# Altium PCB test_blood_pressure.PcbDoc
Units mil, origin at the board's own origin, x right, y up, seen from the top; angles counter-clockwise.
Board outline 2765.94 x 1295.03 mil, 2 copper layers (Top Layer, Bottom Layer); 50 components, 51 nets, 240 pads, 41 vias.
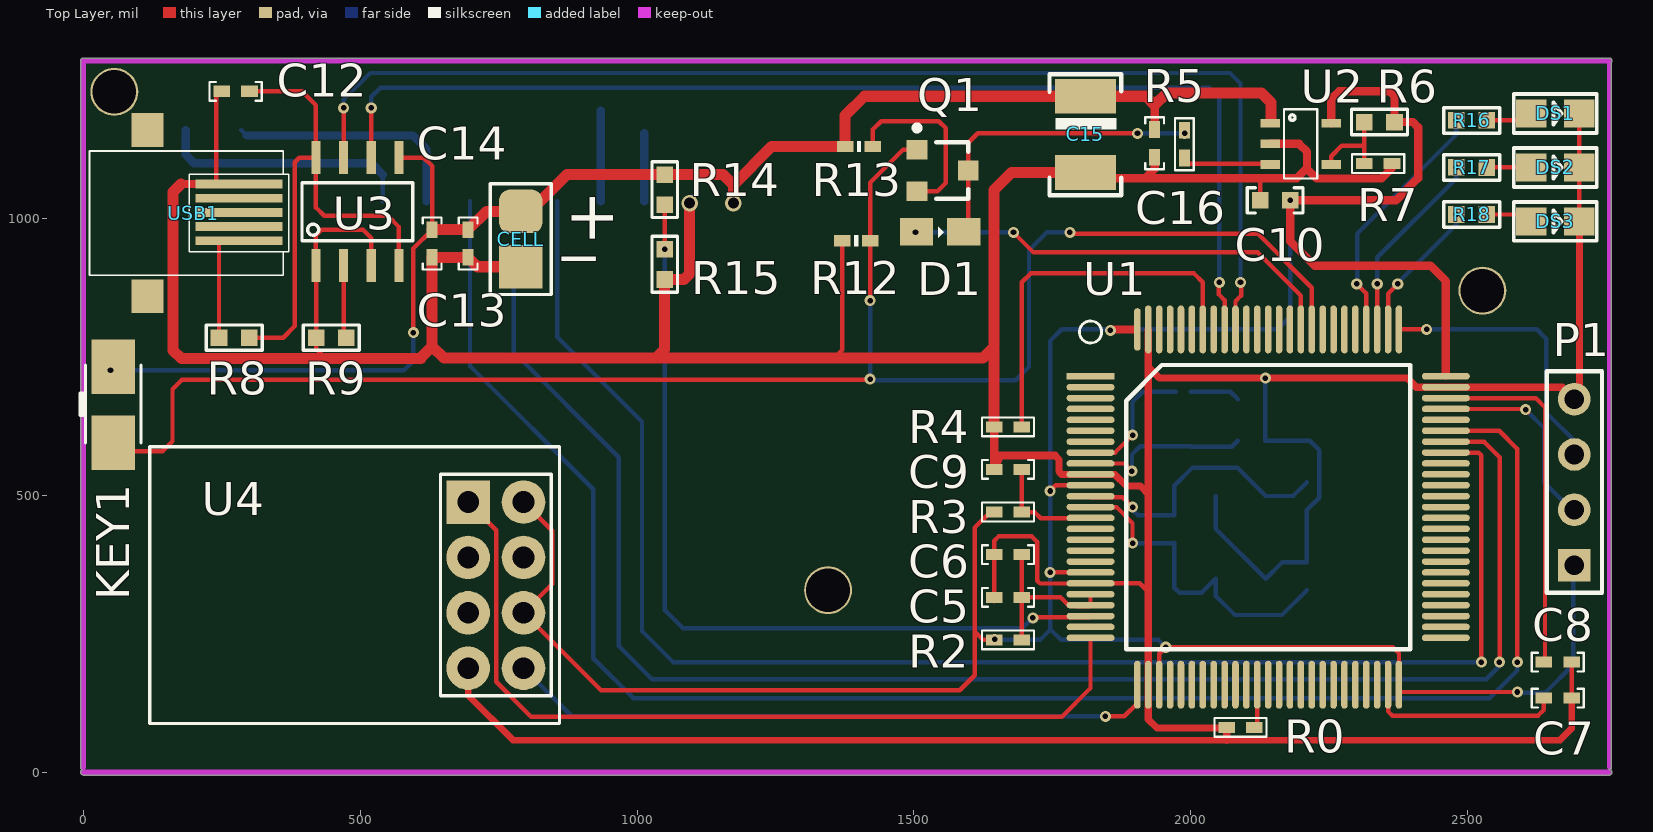
[diagram p0: Top Layer view]
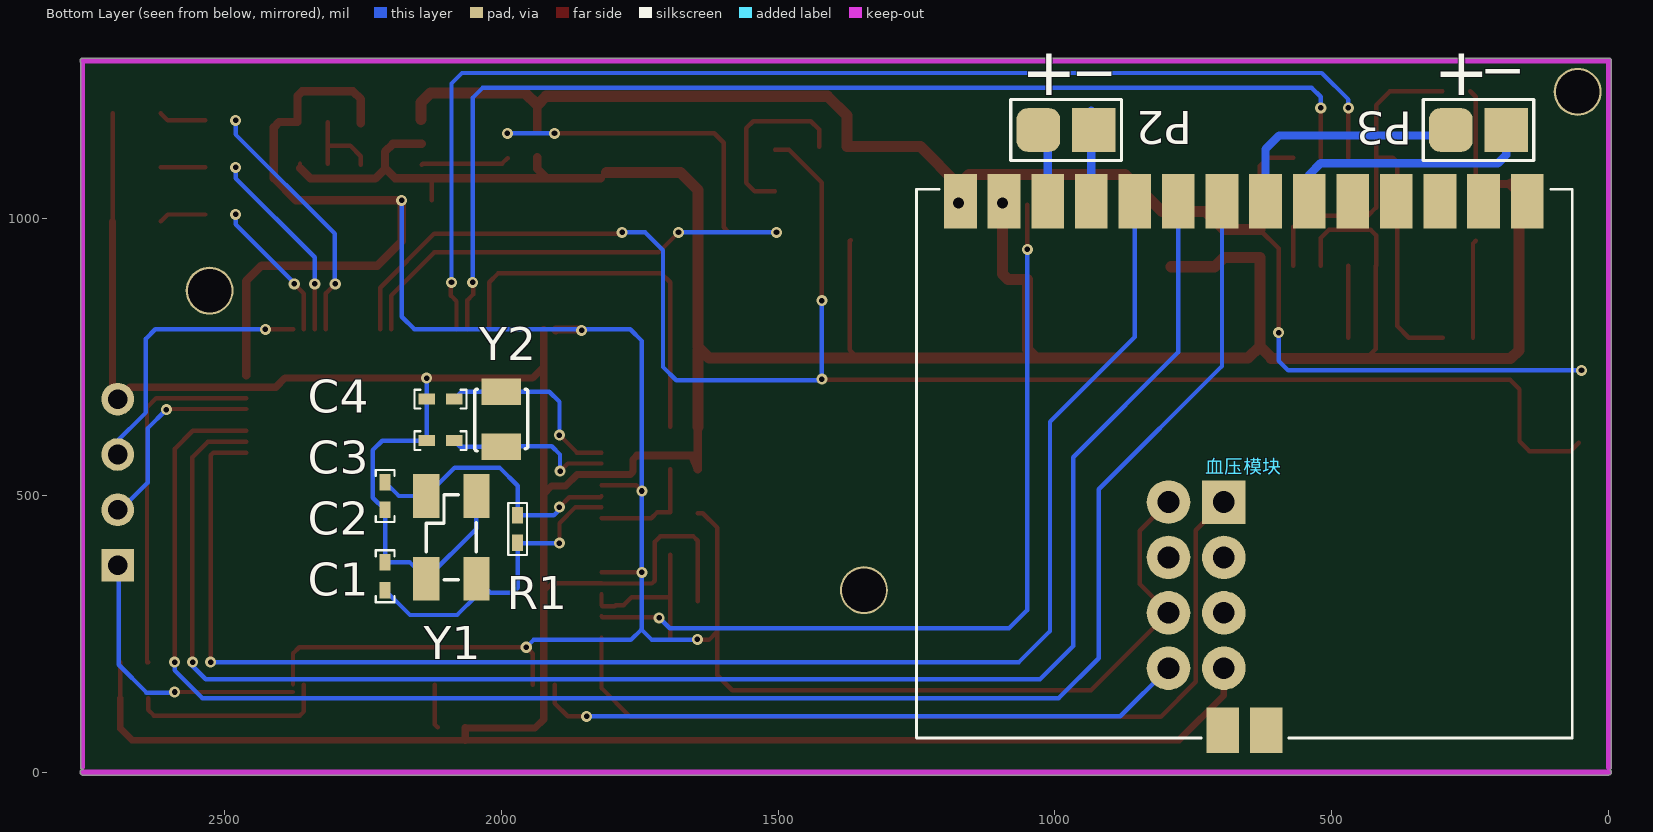
[diagram p1: Bottom Layer view, seen from below]

## Layer stack, top to bottom
Top Layer: signal copper 1.4
Dielectric: dielectric 12.6, FR-4, Dk 4.8
Bottom Layer: signal copper 1.4

## Board outline
-2.21,4.5 cw(c0,9) -5.02,9 -5.02,1285 cw(c0,1285) 0,1290.02 2755.91,1290.02 cw(c2755.91,1285) 2760.92,1285 cw(c2755.91,1285) 2759.92,1281.99 2759.92,9 cw(c2755.91,9) 2756.27,5 cw(c2755.91,0) 2760.92,0 cw(c2755.91,0) 2755.91,-5.01 0,-5.01 cw(c0,0)

## Design rules (kind name [scope] priority, off if disabled: settings)
Clearance [All] p1: gap=6
HoleToHoleClearance [All] p1: gap=6 allowstackedmicrovias=TRUE
MinimumSolderMaskSliver [All] p1: minsoldermaskwidth=0
PolygonConnect [All] p1: connectstyle=Relief reliefconductorwidth=10 reliefentries=4 polygonreliefangle="90 Angle"
RoutingVias [All] p1: holewidth=10 width=20 viastyle="Through Hole" minholewidth=10 minwidth=50 maxholewidth=28 maxwidth=50
SilkToSilkClearance [All] p1: silktosilkclearance=0
SilkscreenOverComponentPads [All] p1: minsilkscreentomaskgap=0
SolderMaskExpansion [All] p1: expansion=4
Width [All] p1: maxlimit=30 minlimit=8 preferedwidth=8
24 further rules are at their usual default settings.

## Components (designator, comment, footprint, x,y, rotation, side; value= is the part's Value field where it differs from the comment)
C1 "22pf" C_0402 2210,474 r90 bottom
C2 "22pf" C_0402 2210,379 r270 bottom
C3 "10pf" C_0402 2085,599 r0 bottom
C4 "10pf" C_0402 2085,674 r0 bottom
C5 "10uf" C_0402 1695,316 r180 top
C6 "104" C_0402 1695,393 r180 top
C7 "2.2uf" C_0402 2638,134 r0 top
C8 "2.2uf" C_0402 2638,199 r0 top
C9 "104" C_0402 1695,547 r180 top
C10 "104" C_0603 2180,1033 r180 top
C12 "10uf" C_0402 300,1230 r180 top
C13 "10uf" C_0402 630,930 r90 top
C14 "4.7uf" C_0402 695,980 r270 top
C15 "220uF" C_3528 1810,1221 r270 top
C16 "104" C_0402 1935,1111 r90 top
CELL "CELL" CELL 790,1013 r270 top
D1 "Comment" D_0805 1504,975 r0 top
DS1 "LED1" SMDLED 2615,1190 r0 top
DS2 "LED1" SMDLED 2615,1092.5 r0 top
DS3 "LED1" SMDLED 2615,995 r0 top
KEY1 "button_2pin" SMD2_3.5 54,595 r90 top
P1 "Header 4" HDR1X4 2693,374 r90 top
P2 "solenoid valve" CELL 1030,1160 r180 bottom
P3 "motor" CELL 285,1160 r180 bottom
Q1 "Comment" SOT-23R 1547,1087 r270 top
R0 "10k" R_0402 2065,81 r0 top
R1 "1M" R_0402 1970.55,464.39 r270 bottom
R2 "10k" R_0402 1645,239 r0 top
R3 "10k" R_0402 1645,470 r0 top
R4 "10k" R_0402 1645,624 r0 top
R5 "100k" R_0402 1988.6,1109.4 r90 top
R6 "16.7k" R_0603 2313.6,1174.4 r0 top
R7 "10k" R_0402 2363.6,1099.4 r180 top
R8 "0.4" R_0603 245,785 r0 top
R9 "0.4" R_0603 475,784.94 r180 top
R12 "Comment" L_0402 1371,960 r0 top
R13 "Comment" L_0402 1426,1130 r180 top
R14 "10k" R_0603 1050,1025 r90 top
R15 "10k" R_0603 1050,890 r90 top
R16 "660" R_0603 2480,1177.44 r0 top
R17 "660" R_0603 2480,1092.47 r0 top
R18 "660" R_0603 2480,1007.5 r0 top
U1 "STM32F407Vxx" LQFP-100 2140,479 r0 top
U2 "SP3819M" SPX3819 2143.6,1172.4 r0 top
U3 "TP4056" TP4056 420,915 r90 top
U4 "WIFI_ESP8266" ESP8266 695,488 r90 top
USB1 "MicroUSB" MicroUSB 211,960 r90 top
Y1 "8M" TXAL_5032 2135.55,499 r270 bottom
Y2 "32.768k" TXAL_3215 2000,589 r90 bottom
血压模块 "Comment" 血压模块 655,555 r90 bottom

## Footprints (in the part's own frame and the unit in brackets; to place one, negate y for a bottom-side part, rotate by r counter-clockwise, add the part's x,y. Pads: shape width x height; smd on the part's side, far side on the other; paste and mask are expansions set on the pad)
C_0402 [mil]
  rect 30x20 smd: 1(0,0) 2(50,0)
  silkscreen extent -22,-17 72,17
C_0603 [mil]
  rect 30x30 smd: 1(0,0) 2(54.5,-0.06)
  silkscreen extent -23,-23 78,23
C_3528 [mm]
  rect 1.6x2.8 smd: 1(0,0) 2(3.5,0)
  silkscreen extent -1.02,-1.65 4.55,1.65
CELL [mm]
  rrect50% 2x2 smd: 1(0,0)
  rect 2x2 smd: 2(2.54,0)
  silkscreen extent -1.27,-1.4 3.81,1.4
D_0805 [mil]
  rect 60x50 smd: 1(1,1) 2(86,1)
  silkscreen extent 40,-10 50,10
ESP8266 [mm]
  rect 2x2 hole 1: 1(0,0)
  round 2 hole 1: 2(0,-2.54) 3(-2.54,0) 4(-2.54,-2.54) 5(-5.08,0) 6(-5.08,-2.54) 7(-7.62,0) 8(-7.62,-2.54)
  silkscreen extent -10.16,-4.19 2.54,14.6
HDR1X4 [mm]
  rect 1.5x1.5 hole 0.9: 1(0,0)
  round 1.5 hole 0.9: 2(2.54,0) 3(5.08,0) 4(7.62,0)
  silkscreen extent -1.27,-1.27 8.89,1.27
L_0402 [mil]
  rect 30x20 smd: 1(0,0) 2(50,0)
  silkscreen extent 21,-10 29,10
LQFP-100 [mm]
  rect 2.2x0.3 smd: 1(-8.15,6)
  oval 2.2x0.3 smd: 2(-8.15,5.5) 3(-8.15,5) 4(-8.15,4.5) 5(-8.15,4) 6(-8.15,3.5) 7(-8.15,3) 8(-8.15,2.5) 9(-8.15,2) 10(-8.15,1.5) 11(-8.15,1) 12(-8.15,0.5) 13(-8.15,0) 14(-8.15,-0.5) 15(-8.15,-1) 16(-8.15,-1.5) 17(-8.15,-2) 18(-8.15,-2.5) 19(-8.15,-3) 20(-8.15,-3.5) 21(-8.15,-4) 22(-8.15,-4.5) 23(-8.15,-5) 24(-8.15,-5.5) 25(-8.15,-6) 51(8.15,-6) 52(8.15,-5.5) 53(8.15,-5) 54(8.15,-4.5) 55(8.15,-4) 56(8.15,-3.5) 57(8.15,-3) 58(8.15,-2.5) 59(8.15,-2) 60(8.15,-1.5) 61(8.15,-1) 62(8.15,-0.5) 63(8.15,0) 64(8.15,0.5) 65(8.15,1) 66(8.15,1.5) 67(8.15,2) 68(8.15,2.5) 69(8.15,3) 70(8.15,3.5) 71(8.15,4) 72(8.15,4.5) 73(8.15,5) 74(8.15,5.5) 75(8.15,6)
  oval 0.3x2.2 smd: 26(-6,-8.15) 27(-5.5,-8.15) 28(-5,-8.15) 29(-4.5,-8.15) 30(-4,-8.15) 31(-3.5,-8.15) 32(-3,-8.15) 33(-2.5,-8.15) 34(-2,-8.15) 35(-1.5,-8.15) 36(-1,-8.15) 37(-0.5,-8.15) 38(0,-8.15) 39(0.5,-8.15) 40(1,-8.15) 41(1.5,-8.15) 42(2,-8.15) 43(2.5,-8.15) 44(3,-8.15) 45(3.5,-8.15) 46(4,-8.15) 47(4.5,-8.15) 48(5,-8.15) 49(5.5,-8.15) 50(6,-8.15) 76(6,8.15) 77(5.5,8.15) 78(5,8.15) 79(4.5,8.15) 80(4,8.15) 81(3.5,8.15) 82(3,8.15) 83(2.5,8.15) 84(2,8.15) 85(1.5,8.15) 86(1,8.15) 87(0.5,8.15) 88(0,8.15) 89(-0.5,8.15) 90(-1,8.15) 91(-1.5,8.15) 92(-2,8.15) 93(-2.5,8.15) 94(-3,8.15) 95(-3.5,8.15) 96(-4,8.15) 97(-4.5,8.15) 98(-5,8.15) 99(-5.5,8.15)
  oval 0.3x1.95 smd: 100(-6,8.15)
  silkscreen extent -8.66,-6.51 6.51,8.54
MicroUSB [mm]
  rect 0.4x4 smd: 1(0,-1.778) 2(0.65,-1.778) 3(1.3,-1.778) 4(1.95,-1.778) 5(2.6,-1.778)
  rect 1.543x1.46 smd: 6(-2.54,2.413) 7(5.08,2.413)
  silkscreen extent -1.57,-4.06 4.11,5.08
R_0402 [mil]
  rect 30x20 smd: 1(0,0) 2(50,0)
  silkscreen extent -22,-17 72,17
R_0603 [mil]
  rect 30x30 smd: 1(0,0) 2(54.5,-0.06)
  silkscreen extent -23,-23 78,23
SMD2_3.5 [mm]
  rect 2.5x2 smd: 1(0,0) 2(3.5,0)
  silkscreen extent 0,-1.27 3.56,1.52
SMDLED [mm]
  rect 1.4x1.27 smd: 1(0.001,-0.002) 2(2.211,-0.002)
  silkscreen extent -0.8,-0.89 3.01,0.89
SOT-23R [mm]
  rect 0.9x0.95 smd: 1(-0.95,-1.048) 2(0.95,-1.048) 3(0,1.302)
  silkscreen extent -2.07,-1.17 1.3,1.3
SPX3819 [mm]
  rect 0.9x0.4 smd: 1(0,0) 2(0,-0.95) 3(0,-1.9) 4(2.8,-1.9) 5(2.8,0)
  silkscreen extent 0.63,-2.54 2.16,0.64
TP4056 [mm]
  rect 1.513x0.42 smd: 1(0,0) 2(0,-1.27) 3(0,-2.54) 4(0,-3.81) 5(4.953,-3.81) 6(4.953,-2.54) 7(4.953,-1.27) 8(4.953,0)
  silkscreen extent 1.14,-4.44 3.81,0.64
TXAL_3215 [mm]
  rect 1.2x1.8 smd: 1(-0.025,0) 2(2.5,0)
  silkscreen extent -0.22,-1.22 2.62,1.22
TXAL_5032 [mm]
  rect 2x1.2 smd: 1(0,0) 2(3.8,0) 3(3.8,2.3) 4(0,2.3)
  silkscreen extent -0.05,0 3.84,2.29
血压模块 [mm]
  rect 2.5x1.5 smd: 1(12.09,13.102) 2(12.09,11.102) 3(12.09,9.102) 4(12.09,7.102) 5(12.09,5.102) 6(12.09,3.102) 7(12.09,1.102) 8(12.09,-0.898) 9(12.09,-2.898) 10(12.09,-4.898) 11(12.09,-6.898) 12(12.09,-8.898) 13(12.09,-10.898) 14(12.09,-12.898)
  rect 2.1x1.5 smd: 15(-12.167,1.071) 16(-12.167,-0.929)
  silkscreen extent -12.52,-14.97 12.65,15.11

## Part data
CELL: "锂?"
KEY1: library part KEY_2
U2: "稳?"
U3: "充?"
U4: "安?"
USB1: "迷你u"
Y1: library part XTAL_5032/3225, "XTAL_5032/3225"
Y2: library part XTAL_1

## Free pads (board coordinates)
  round 86.61 hole 78.74: 0(56,1229) 1(1345,329) 2(2527,870)

## Via types
v1: diameter 20, hole 10, Top Layer to Bottom Layer, 39 vias
v2: diameter 30, hole 20, Top Layer to Bottom Layer, 2 vias

## Nets (pads, with @x,y where several pads share a name; then routed paths per layer and width w, separated by ;. In a path a pad name is that pad's centre, name@x,y a point inside that pad or via, vN(x,y) a via of type N, cw(c..) or ccw(c..) an arc to the next point about the centre after c; other vN are vias at no path point)
B_RXD: U1.69 血压模块.6 | length 2989.1
  Top Layer w8: U1.69 2530,597.11 2558,569 v1@2558,199
  Bottom Layer w8: 血压模块.6 777.11,758.89 967,569 967,228 1027,168 2534,168 v1@2560,194
  other v1: 2557.5,199
B_S/W: U1.70 血压模块.7 | length 3179.5
  Top Layer w8: U1.70 2557.21,616.8 2590,584 v1(2590,199)
  Bottom Layer w8: 血压模块.7 698.37,733.63 921,511 921,206 993,134 2540,134 2590,184 v1(2590,199)
B_TXD: U1.68 血压模块.5 | length 2818.3
  Top Layer w8: U1.68 2520,577.43 2525,572.43 v1(2525,199)
  Bottom Layer w8: 血压模块.5 855.85,786.15 1009,633 1009,255 1065,199 v1(2525,199)
CHK_1: U1.92 U3.6 | length 2078.9
  Top Layer w8: U3.6 v1(520,1200) ; v1(2052,885) 2051,884 2051,863 2061.26,852.74 U1.92
  Bottom Layer w8: v1(520,1200) 520,1220 536,1236 2034,1236 2052,1218 v1(2052,885)
CHK_2: U1.91 U3.7 | length 2201.5
  Top Layer w8: U3.7 v1(470,1200) ; U1.91 2080.95,850.95 2091,861 2091,884 v1(2090,885)
  Bottom Layer w8: v1(470,1200) 470,1215 518,1263 2071,1263 2090,1244 v1(2090,885)
EQ_CHK: R14.1 R15.2 U1.23 | length 1524
  Top Layer w8: v1(1050,944.56) R14.1 ; v1@1720.37,280.37 1817.36,280.37 U1.23
  Bottom Layer w8: v1(1050,944.56) 1050,293 1083,260 1696,260 v1(1715,279) 1719,279 v1@1720.37,280.37
GND: C1.1 C2.1 C3.2 C4.2 C5.2 C6.2 C7.2 C8.2 C9.2 C10.2 C12.2 C13.1 C14.2 C15.2 C16.1 CELL.2 DS1.2 DS2.2 DS3.2 P1.4 R0.1 R4.1 R7.1 R9.2 R12.1 R15.1 U1.10 U1.20 U1.27 U1.74 U1.99 U2.2 U3.1 U3.3 U4.7 USB1.5 Y1.2 Y1.4 血压模块.2 | length 10748.3
  Top Layer w8: USB1.5@240,1062.36 240,1220 C12.2 ; 438,747 420.5,764.5 420.5,914.5 U3.1 420,970 430,980 505,980 520,965 U3.3 ; v2@1091,1024.07 v2(1095,1028.07) v2@1096,1027.07 ; 1356,748 1371,763 R12.1@1371,959 ; R12.1@1369,961 R12.1@1371,959 ; R12.1 R12.1@1371,959 ; 1625,748 1631,748 1645,762 ; C5.2@1645,309 C5.2 C6.2 ; C6.2@1645,395 1645,418 1653,426 1713,426 1723,416 1723,346 1728,341 1818.93,341 U1.20 1908.26,341.21 1923.47,326 ; C9.2@1645,544 C9.2 ; C15.2 C15.2@1820.2,1073 ; U1.99 U1.99@1925.25,798.09 ; C10.2 2125.5,1072.5 2126,1073 ; 2210,1090 2210,1091 ; R7.1@2363.6,1091 R7.1 ; U1.74@2459.09,697.31 U1.74 ; C7.2 C8.2 ; DS3.2 DS2.2 DS1.2
  Top Layer w12: U4.7 695,139 776,58 2065,58 2667,58 2688,79 C7.2
  Top Layer w13: 1755,572 1762,565 1762,543 1766.94,538.06 U1.10 1862.94,538.06 1884,517 1909.47,517 1923.47,503 ; U1.99 1923.47,732 ; R0.1@2059,80 1939,80 1923.47,95.53 U1.27 1923.47,326 1923.47,503 ; 2065,58 R0.1 ; U1.74@2459.09,695.47 2407.53,695.47 2391,712 1943.47,712 1923.47,732 ; U1.74 2671.46,695.54 P1.4 2702.04,683.04 DS3.2 ; 1923.47,503 1923.47,732
  Top Layer w15: 176,1062.36 USB1.5@240,1062.36 ; R4.1 C9.2 1655,572 1755,572 ; C15.2@1820.2,1073 1918,1073 ; C16.1 1935,1090 1918,1073 ; U2.2 2196,1135 2210,1121 2210,1091 2192,1073 2126,1073 1918,1073 ; 2210,1090 2227.6,1072.4 2345,1072.4 R7.1@2363.6,1091
  Top Layer w20: 176,1062.36 162.01,1048.37 162.01,761.99 177,747 438,747 610,747 610,749 630,769 ; CELL.2 712,913 C14.2 C13.1 630,769 ; v2@1095,1027.07 1095,900 1085,890 R15.1 1050,764 1034,748 ; R4.1 1645,762 ; C15.2 1676.2,1083.2 1645,1052 1645,768 1625,748 1356,748 1034,748 ; 630,769 651,748 1034,748
  Bottom Layer w8: 血压模块.2@1109,1047.93 血压模块.2 ; Y1.4 2045,439.95 Y1.2 2165.16,379 C2.1 C1.1 2232,496 2232,582 2215,599 C3.2 C4.2 v1(2135,712) ; 血压模块.2 v2(1095,1028.07) 1091,1029.93 血压模块.2
LED1: R16.1 U1.79 | length 450.8
  Top Layer w8: v1(2300,882) 2317.17,864.83 U1.79
  Bottom Layer w8: v1@2301,890 2301,973 2480,1152 v1(2480,1177.44)
LED2: R17.1 U1.78 | length 346.9
  Top Layer w8: U1.78 2337,800.02 v1(2337,882)
  Bottom Layer w8: v1@2337,887 2337,930 2480,1073 v1(2480,1092.47)
LED3: R18.1 U1.77 | length 259.6
  Top Layer w8: U1.77 2356.54,864.54 v1(2374,882)
  Bottom Layer w8: v1@2372,882 2480,990 v1(2480,1007.5)
NetC1_2: C1.2 R1.1 U1.12 Y1.1 | length 506.2
  Top Layer w8: U1.12 1820.91,496.91 1877.09,496.91 v1(1895,479)
  Bottom Layer w8: v1(1895,479) 1895,474.39 1905,464.39 R1.1 1970.55,517.55 2003.37,550.37 2084.18,550.37 Y1.1 2185,499 C1.2
NetC2_2: C2.2 R1.2 U1.13 Y1.3 | length 598
  Top Layer w8: U1.13 1866,479 1895,450 v1(1895,414)
  Bottom Layer w8: v1(1895,414) 1970.16,414 R1.2 1970.55,333.45 1980,324 2019.61,324 Y1.3 2045,319 2080,284 2165,284 C2.2
NetC3_1: C3.1 U1.9 Y2.1 | length 312.5
  Top Layer w8: U1.9 1880,557.74 v1(1893.74,544)
  Bottom Layer w8: v1@1894,544 1894,574 1909,589 1999,589 Y2.1 2074,588 C3.1
NetC4_1: C4.1 U1.8 Y2.2 | length 325.6
  Top Layer w8: U1.8 1863.43,577.43 v1(1895,609)
  Bottom Layer w8: v1(1895,609) 1895,669 1913.43,687.43 Y2.2@1973.43,687.43 ; Y2.2 2071.57,687.43 C4.1
NetC5_1: C5.1 C6.1 R2.2 U1.21 U1.22 | length 307.7
  Top Layer w8: R2.2 C5.1 ; C6.1 C5.1 ; U1.21 U1.22 ; C5.1 1764.76,316 1778.76,302 1793.06,302 1795,300.06 U1.22@1817.36,300.06 ; U1.22@1817.36,300.06 U1.22 ; U1.22@1817.36,300.06 U1.22
NetC5_2: 
NetC7_1: C7.1 U1.49 | length 358.1
  Top Layer w8: U1.49 2356.54,109.93 2364,102.46 2627.46,102.46 2638,113 C7.1
NetC8_1: C8.1 U1.73 | length 648.1
  Top Layer w8: U1.73 2623.15,675.85 2640,659 2640,199 C8.1
NetC9_1: C9.1 R3.2 U1.14 | length 205.8
  Top Layer w8: C9.1 R3.2 1718,470 1729,459 1818.82,459 U1.14
NetC12_1: C12.1 R8.2 U3.4 U3.8 | length 978.4
  Top Layer w8: R8.2 360.94,784.94 382,806 382,1102 390,1110 U3.8 ; C12.1 395,1230 420,1205 U3.8 ; U3.4 570,985 550,1005 435,1005 420,1020 U3.8
NetD4_1: 
NetD4_2: 
NetDS1_1: DS1.1 R16.2 | length 85.7
  Top Layer w8: R16.2 2602.47,1177.37 DS1.1
NetDS2_1: DS2.1 R17.2 | length 80.5
  Top Layer w8: R17.2 DS2.1
NetDS3_1: DS3.1 R18.2 | length 85.7
  Top Layer w8: R18.2 2602.53,1007.44 DS3.1
NetP2_1: P2.1 血压模块.3 | length 123
  Bottom Layer w15: 血压模块.3 P2.1@1013.33,1154
NetP2_2: P2.2 血压模块.4 | length 164.4
  Bottom Layer w15: 血压模块.4 P2.2@934.59,1195.41
NetP3_1: P3.1 血压模块.8 | length 443.3
  Bottom Layer w8: P3.1 P3.1@295,1150
  Bottom Layer w15: P3.1@295,1150 595,1150 619.63,1125.37 血压模块.8
NetP3_2: P3.2 血压模块.9 | length 463.9
  Bottom Layer w8: 血压模块.9 血压模块.9@540.89,1079.11
  Bottom Layer w15: P3.2 185,1115 200,1100 520,1100 血压模块.9@540.89,1079.11
NetQ1_2: 
NetQ2_2: 
NetR0_2: R0.2 U1.37 | length 79.3
  Top Layer w8: R0.2 2120.32,86.32 U1.37
NetR4_2: R4.2 U1.94 | length 686.3
  Top Layer w8: R4.2 1695,885 1711,901 2006,901 2021.89,885.11 U1.94
NetR5_1: R5.1 U2.3 | length 159.9
  Top Layer w8: R5.1 1998.6,1099.4 2141.8,1099.4 U2.3
NetR6_1: R6.1 R7.2 U2.4 | length 157.6
  Top Layer w8: U2.4 2253.83,1112.64 2272.6,1131.4 2313.6,1131.4 ; R7.2 2313.6,1131.4 ; R6.1 2313.6,1131.4
NetR8_1: R8.1 USB1.1 | length 177.1
  Top Layer w8: USB1.1@240,960 245,955 R8.1
NetR9_1: R9.1 U3.2 | length 130.1
  Top Layer w8: R9.1@470,784.94 U3.2
OFF/ON: D1.1 U1.85 | length 804.4
  Top Layer w8: v1(1680,975) 1716,939 2121,939 2199.06,860.94 U1.85
  Bottom Layer w8: v1(1503,975) v1(1680,975)
PORWER+: 
PORWER_CHK: KEY1.1 Q1.1 R12.2 U1.84 | length 3095.9
  Top Layer w8: KEY1.1 69,580 143,580 161,598 161,692 178,709 v1@1421,709 ; v1(1421,852) 1421,1065 1480.4,1124.4 Q1.1 ; v1@1782,973 2121,973 2218.74,875.26 U1.84
  Bottom Layer w8: v1(1421,852) v1(1421,710) 1421,708 1684,708 1708,732 1708,943 1740,975 v1(1782,975)
PORWER_IN: 
Q1: Q1.2 R13.1 | length 331.2
  Top Layer w8: R13.1 1426,1161 1441,1176 1545,1176 1558,1163 1558,1065 1542.6,1049.6 Q1.2
Q2: 
Q3: D1.2 Q1.3 R5.2 | length 562.2
  Top Layer w8: D1.2 1598.26,984.26 Q1.3 1598.26,1137 1615.26,1154 v1(1904,1154)
  Bottom Layer w8: v1(1904,1154) v1(1989,1154)
SWCLK: P1.3 U1.76 | length 505.5
  Top Layer w8: U1.76 2376.35,800 v1(2426,800)
  Bottom Layer w8: v1(2426,800) 2625,800 2642,783 2642,650 2699,593 P1.3@2699,574
SWDIO: P1.2 U1.72 | length 385.1
  Top Layer w8: U1.72 2603.84,656.17 2610,650 v1(2605,655)
  Bottom Layer w8: v1(2605,655) 2639,621 2639,523 2688,474 P1.2@2699,474
VBAT: 
VCC3.3: C10.1 P1.1 R2.1 R3.1 R6.2 U1.11 U1.19 U1.28 U1.50 U1.75 U1.100 U2.5 U4.2 U4.6 | length 5399.6
  Top Layer w8: U4.6 935,148 1583,148 1610,175 1610,254 ; U4.2 847,436 847,340 U4.6@811,304 ; R2.1 1625,239 1610,254 ; R3.1@1645,468 1636,468 1610,442 1610,254 ; v1(1746,361) 1819.02,361 U1.19 ; v1(1746,508) 1756.37,518.37 U1.11 ; U1.28 1943.15,214 v1(1955,225.85) 2365.15,225.85 2376.35,214.65 U1.50@2376.35,159 ; U1.50@2377,145 v1(2590,145)
  Top Layer w15: v1(1855,798) 1856.87,799.87 1901.91,799.87 U1.100@1901.91,798 ; U2.5 2253.83,1215.83 2268,1230 2360,1230 2368.1,1221.9 R6.2 2401.66,1174.34 2411,1165 2411,1073 2371,1033 v1(2180,1033) 2180,959 2224,915 2433,915 2460.87,887.13 U1.75@2460.87,716.47
  Bottom Layer w8: v1@1646,239 1728,239 1747,258 1766,239 1941.85,239 v1(1955,225.85) ; 1746,259 v1(1746,361) v1(1746,508) 1746,779 1767,800 2157,800 2180,823 v1(2180,1033) ; v1@2590,144 2641,144 2691,194 2691,366 P1.1@2699,374
  other v1: 1646,240
VCC3.7: C13.2 C14.1 C15.1 C16.2 CELL.1 KEY1.2 R13.2 R14.2 U2.1 U3.5 血压模块.1 | length 2780.1
  Top Layer w8: U3.5 615,1110 630,1095 C13.2 596,946 v1(596,794)
  Top Layer w15: C16.2 1935,1205
  Top Layer w20: C13.2 C14.1 728,1013 CELL.1 807,1013 873.5,1079.5 R14.2 1155.5,1079.5 1174,1061 ; v2(1174,1028) 1174,1061 ; U2.1@2145,1179 2145,1210 2128,1227 1957,1227 1935,1205 1919,1221 C15.1 1411,1221 1376,1186 R13.2 1243,1130 1174,1061
  Bottom Layer w8: v1(49,726) 579,726 596,743 v1(596,794)
WIFI_RXD: U1.25 U4.1 | length 1557.6
  Top Layer w8: U4.1 745.63,437.37 745.63,163.37 809,100 1767,100 1819.13,152.13 U1.25
WIFI_TXD: U1.26 U4.8 | length 1201
  Top Layer w8: U4.8@795,175 U4.8 ; v1(1846,101) 1880,101 1903.78,124.78 U1.26
  Bottom Layer w8: U4.8 882,101 v1(1846,101)
pads on no net: U1.1 U1.2 U1.3 U1.4 U1.5 U1.6 U1.7 U1.15 U1.16 U1.17 U1.18 U1.24 U1.29 U1.30 U1.31 U1.32 U1.33 U1.34 U1.35 U1.36 U1.38 U1.39 U1.40 U1.41 U1.42 U1.43 U1.44 U1.45 U1.46 U1.47 U1.48 U1.51 U1.52 U1.53 U1.54 U1.55 U1.56 U1.57 U1.58 U1.59 U1.60 U1.61 U1.62 U1.63 U1.64 U1.65 U1.66 U1.67 U1.71 U1.80 U1.81 U1.82 U1.83 U1.86 U1.87 U1.88 U1.89 U1.90 U1.93 U1.95 U1.96 U1.97 U1.98 U4.3 U4.4 U4.5 USB1.2 USB1.3 USB1.4 USB1.6 USB1.7 血压模块.10 血压模块.11 血压模块.12 血压模块.13 血压模块.14 血压模块.15 血压模块.16

## Keep-outs
Keep-Out Layer:
  lines w8: 2755.91,9 2755.91,1285
  lines w10: 0,0 2755.91,0 ; 0,9 0,1285 2755.91,1285

## Silkscreen, mask and mechanical layers (free items; w line width, h text height)
Top Overlay:
  text "定位孔：M2" at 111,-450 h150
  text "所有单位：mm" at 79,-650 h150
Top Solder:
  text "future studio" at 1085,522 h70
  text "2016.07.27" at 1110,432 h70

## Dimensions
0,0 to 2755.91,9 on Top Overlay
0,0 to 0,1285 on Top Overlay
0,0 to 1345,329 on Top Overlay
0,0 to 56,1229 on Top Overlay
0,1285 to 2527,870 on Top Overlay
11,898 to 11,1122 on Top Overlay
0,0 to -246,898 on Top Overlay
2755.91,0 to 2743,324 on Top Overlay
2797,324 to 2743,724 on Top Overlay
2733.54,959.94 to 2733.54,1224.94 on Top Overlay
2755.91,1285 to 2903,1224.94 on Top Overlay
2527,870 to 2755.91,1285 on Top Overlay
1345,329 to 0,0 on Top Overlay
56,1229 to 0,1290.02 on Top Overlay

## Text inside footprints (layer, text, board x,y; h text height)
CELL: Top Overlay "_" at 865,922 h150; Top Overlay "+" at 853,1051 h150 r270
P2: Bottom Overlay "_" at 959,1256 h150; Bottom Overlay "+" at 1061,1194 h150
P3: Bottom Overlay "_" at 221,1261 h150; Bottom Overlay "+" at 316,1194 h150